# EAGLE board base1 (EAGLE 7.2.0)
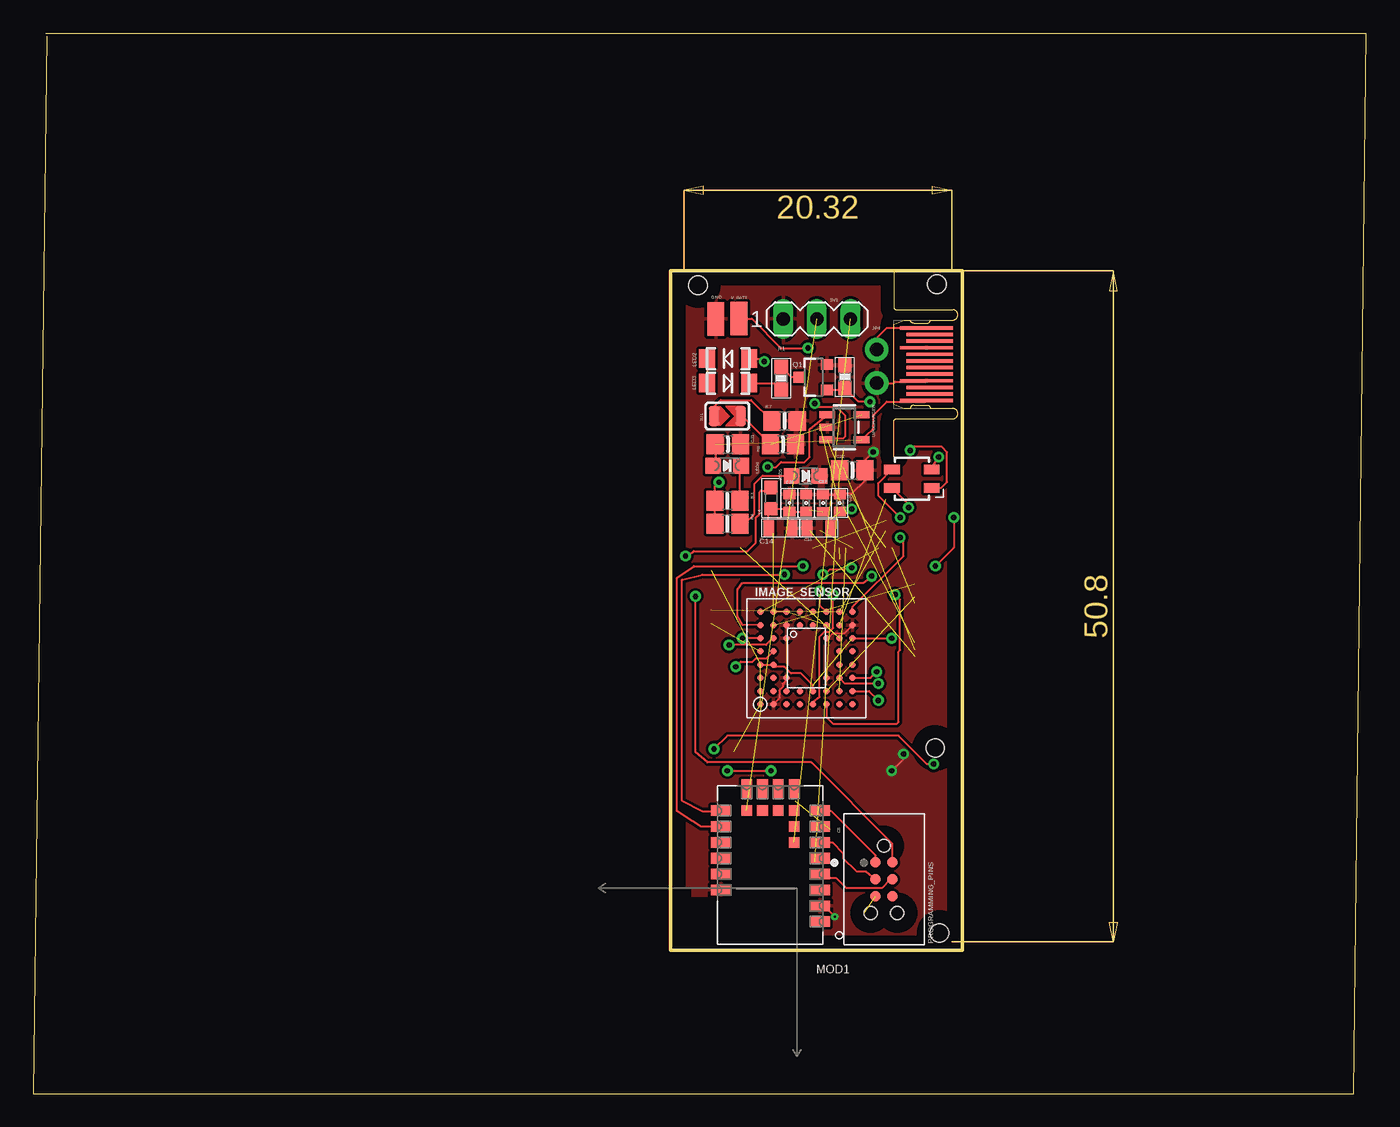
[diagram p0: board, top side]
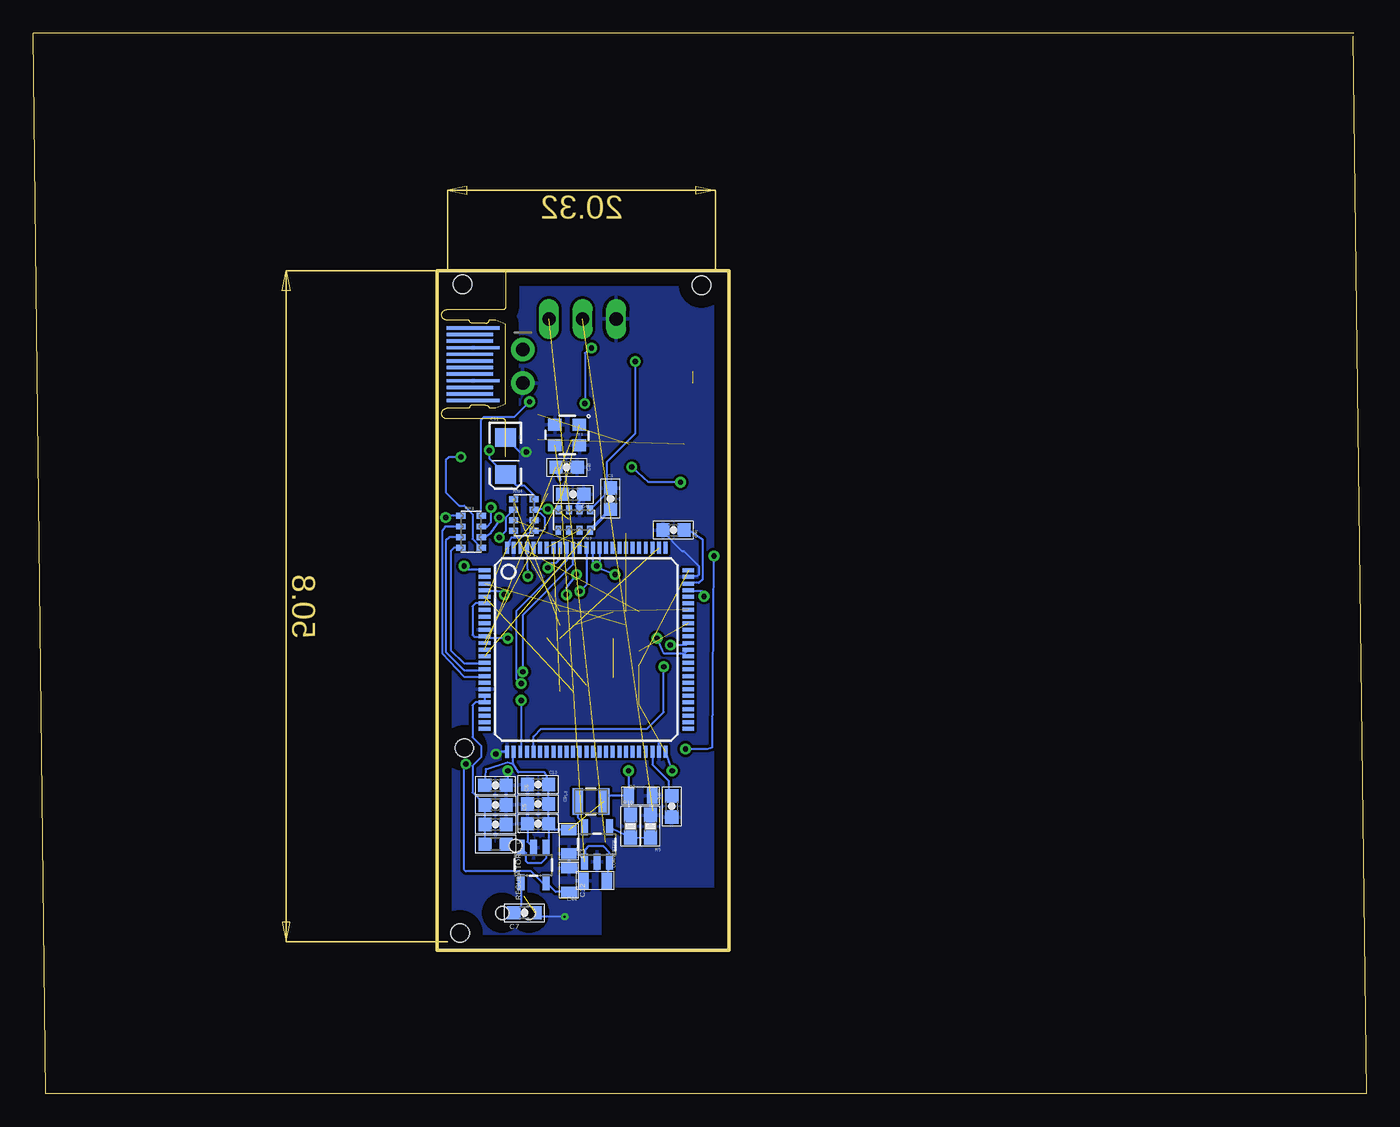
[diagram p1: board, bottom side, seen from below]

Size 100.98 x 80.31 mm. Coordinates in mm from the lower left corner, seen from the top.
Outline: 100.97,80.31 100,0 0,0 1.02,80.07
Outline: 0.98,80.31 100.98,80.31
Outline: 48.26,10.87 70.36,10.87 70.36,62.3 48.26,62.3 48.26,10.87
Copper layers (1*16): Top 0.035mm / dielectric 1.5mm / Bottom 0.035mm
Design rules "default": minimum track width 10mil, minimum drill 24mil, track to track 8mil, track to pad 8mil, pad to pad 8mil, via to via 8mil, smd to smd 8mil, copper to edge 40mil, drill to drill 8mil, minimum pad ring 10mil, minimum via ring 8mil, stop-mask expansion 4mil, vias tented up to drill 0mil, thermal gap 10mil
Net classes: 0 GND: width 0.002 mm, drill 0 mm
Holes 1.4 mm at 68.65,12.18 68.31,26.18 50.35,61.22 68.45,61.28

## Footprints (pad centres in the part's own frame; a part is rotated, then mirrored left to right if it is on the bottom)
0603-CAP = smd 1 x 1: 1 -0.8,0; 2 0.8,0
0805 = smd 0.8 x 1.2: 1 -0.9,0; 2 0.9,0
EIA3216 = smd 1.4 x 1.6: A 1.4,0; C -1.4,0
0402-CAP = smd 0.7 x 0.9: 1 -0.65,0; 2 0.65,0
0805-NO = smd 1.3 x 1.5: 1 -0.95,0; 2 0.95,0
TSOT25 = smd 0.55 x 1.2: 1 -0.95,-1.3; 2 0,-1.3; 3 0.95,-1.3; 4 0.95,1.3; 5 -0.95,1.3
SMD1,27-2,54 = smd 1.27 x 2.54: 1 0,0
IBGA52 = smd 0.5 x 0.5: A1 -3.5,3.5; A2 -2.5,3.5; A3 -1.5,3.5; A4 -0.5,3.5; A5 0.5,3.5; A6 1.5,3.5; A7 2.5,3.5; A8 3.5,3.5; B1 -3.5,2.5; B2 -2.5,2.5; B3 -1.5,2.5; B4 -0.5,2.5; B5 0.5,2.5; B6 1.5,2.5; B7 2.5,2.5; B8 3.5,2.5; C1 -3.5,1.5; C2 -2.5,1.5; C3 -1.5,1.5; C6 1.5,1.5; C7 2.5,1.5; C8 3.5,1.5; D1 -3.5,0.5; D2 -2.5,0.5; D7 2.5,0.5; D8 3.5,0.5; E1 -3.5,-0.5; E2 -2.5,-0.5; E7 2.5,-0.5; E8 3.5,-0.5; F1 -3.5,-1.5; F2 -2.5,-1.5; F3 -1.5,-1.5; F6 1.5,-1.5; F7 2.5,-1.5; F8 3.5,-1.5; G1 -3.5,-2.5; G2 -2.5,-2.5; G3 -1.5,-2.5; G4 -0.5,-2.5; G5 0.5,-2.5; G6 1.5,-2.5; G7 2.5,-2.5; G8 3.5,-2.5; H1 -3.5,-3.5; H2 -2.5,-3.5; H3 -1.5,-3.5; H4 -0.5,-3.5; H5 0.5,-3.5; H6 1.5,-3.5; H7 2.5,-3.5; H8 3.5,-3.5
1X02_ROUND = drill 1 pad 1.778: 1 -1.27,0; 2 1.27,0
0603 = smd 1 x 1: 1 -0.8,0; 2 0.8,0
1007 = smd 2 x 0.8: 1 0,1; 2 0,-1
LED-TRICOLOR-SMD-MF = smd 0.7 x 1.2: A 0.7,1.5; B 0.7,-1.5; G -0.7,-1.5; R -0.7,1.5
LED-1206 = smd 1.2 x 1.4: A -1.6,0; C 1.6,0
CHIPLED_0805_NOOUTLINE = smd 1.2 x 1.2: A 0,-1.05; C 0,1.05
SOT23-5 = smd 0.55 x 1.2: 1 -0.95,-1.3; 2 0,-1.3; 3 0.95,-1.3; 4 0.95,1.3; 5 -0.95,1.3
WE-FP-4+ = smd 0.8 x 1.5: 1 -4.3,-3.75; 2 -3.1,-3.75; 3 -1.9,-3.75; 4 -0.7,-3.75; 5 0.5,-3.75; 6 1.7,-3.75; 7 2.9,-3.75; 8 4.1,-3.75; 13 4.1,3.75; 14 2.9,3.75; 15 1.7,3.75; 16 0.5,3.75; 17 -0.7,3.75; 18 -1.9,3.75 | smd 1.5 x 0.8: 9 5.75,-1.8; 10 5.75,-0.6; 11 5.75,0.6; 12 5.75,1.8 | smd 0.8 x 0.8: B1 1.7,-1.8; B2 2.9,-1.8; B3 4.1,-1.8; B4 4.1,-0.6; B5 4.1,0.6; B6 4.1,1.8
TAG_TC2030-IDC-NL = smd 0.787 x 0.787: 1 -1.27,-0.635; 2 -1.27,0.635; 3 0,-0.635; 4 0,0.635; 5 1.27,-0.635; 6 1.27,0.635 | hole 0.991: -2.54,0; 2.54,1.016; 2.54,-1.016
SOT23-3 = smd 0.8 x 0.9: 1 -0.95,-1; 2 0.95,-1; 3 0,1.1
0603-RES = smd 1.1 x 1: 1 -0.85,0; 2 0.85,0
EXBV8V = smd 0.45 x 0.7: 1 -1.2,-0.775; 2 -0.4,-0.775; 3 0.4,-0.775; 4 1.2,-0.775; 5 1.2,0.775; 6 0.4,0.775; 7 -0.4,0.775; 8 -1.2,0.775
SOLDERJUMPER_ARROW_NOPASTE = smd 0.762 x 1.524: 1 -1.016,0; 2 1.016,0
MA03-1 = drill 1.016 long: 1 -2.54,0; 2 0,0; 3 2.54,0
LQFP100 = smd 0.9 x 0.3: 1 -7.72,6; 2 -7.72,5.5; 3 -7.72,5; 4 -7.72,4.5; 5 -7.72,4; 6 -7.72,3.5; 7 -7.72,3; 8 -7.72,2.5; 9 -7.72,2; 10 -7.72,1.5; 11 -7.72,1; 12 -7.72,0.5; 13 -7.72,0; 14 -7.72,-0.5; 15 -7.72,-1; 16 -7.72,-1.5; 17 -7.72,-2; 18 -7.72,-2.5; 19 -7.72,-3; 20 -7.72,-3.5; 21 -7.72,-4; 22 -7.72,-4.5; 23 -7.72,-5; 24 -7.72,-5.5; 25 -7.72,-6; 51 7.72,-6; 52 7.72,-5.5; 53 7.72,-5; 54 7.72,-4.5; 55 7.72,-4; 56 7.72,-3.5; 57 7.72,-3; 58 7.72,-2.5; 59 7.72,-2; 60 7.72,-1.5; 61 7.72,-1; 62 7.72,-0.5; 63 7.72,0; 64 7.72,0.5; 65 7.72,1; 66 7.72,1.5; 67 7.72,2; 68 7.72,2.5; 69 7.72,3; 70 7.72,3.5; 71 7.72,4; 72 7.72,4.5; 73 7.72,5; 74 7.72,5.5; 75 7.72,6 | smd 0.3 x 0.9: 26 -6,-7.72; 27 -5.5,-7.72; 28 -5,-7.72; 29 -4.5,-7.72; 30 -4,-7.72; 31 -3.5,-7.72; 32 -3,-7.72; 33 -2.5,-7.72; 34 -2,-7.72; 35 -1.5,-7.72; 36 -1,-7.72; 37 -0.5,-7.72; 38 0,-7.72; 39 0.5,-7.72; 40 1,-7.72; 41 1.5,-7.72; 42 2,-7.72; 43 2.5,-7.72; 44 3,-7.72; 45 3.5,-7.72; 46 4,-7.72; 47 4.5,-7.72; 48 5,-7.72; 49 5.5,-7.72; 50 6,-7.72; 76 6,7.72; 77 5.5,7.72; 78 5,7.72; 79 4.5,7.72; 80 4,7.72; 81 3.5,7.72; 82 3,7.72; 83 2.5,7.72; 84 2,7.72; 85 1.5,7.72; 86 1,7.72; 87 0.5,7.72; 88 0,7.72; 89 -0.5,7.72; 90 -1,7.72; 91 -1.5,7.72; 92 -2,7.72; 93 -2.5,7.72; 94 -3,7.72; 95 -3.5,7.72; 96 -4,7.72; 97 -4.5,7.72; 98 -5,7.72; 99 -5.5,7.72; 100 -6,7.72
USB_TYPE_C_DS_2 = smd 0.25 x 4: A1 2.75,-2.45; A4 1.25,-2.45; A9 -1.25,-2.45; A12 -2.75,-2.45 | smd 0.25 x 3.5: A2 2.25,-2.7; A3 1.75,-2.7; A5 0.75,-2.7; A6 0.25,-2.7; A7 -0.25,-2.7; A8 -0.75,-2.7; A10 -1.75,-2.7; A11 -2.25,-2.7 | smd 0.25 x 4 bottom: B1 -2.75,-2.45; B4 -1.25,-2.45; B9 1.25,-2.45; B12 2.75,-2.45 | smd 0.25 x 3.5 bottom: B2 -2.25,-2.7; B3 -1.75,-2.7; B5 -0.75,-2.7; B6 -0.25,-2.7; B7 0.25,-2.7; B8 0.75,-2.7; B10 1.75,-2.7; B11 2.25,-2.7
CRYSTAL-2.5X2.0 = smd 1 x 0.9: 1 -0.95,-0.8; 2 0.9,-0.8; 3 0.9,0.75; 4 -0.95,0.75

## Placement (x,y rotation side)
C1  1uF  [0603-CAP]  57.25,45.06 90 bottom
C2  22uF  [0805]  54.97,22.56 0 bottom
C3  10uF  [0805]  60.4,19.09 90 bottom
C4  1uF  [0603-CAP]  65.95,20.39 0 bottom
C5  0.1uF  [0603-CAP]  65.95,21.87 0 bottom
C6  0.1uF  [0603-CAP]  65.96,23.36 0 bottom
C7  0.1uF  [0603-CAP]  63.76,13.7 0 bottom
C8  0.1uF  [0603-CAP]  62.73,20.46 180 bottom
C9  0.1uF  [0603-CAP]  62.73,21.94 180 bottom
C11  47uF  [EIA3216]  65.2,48.3 270 bottom
C12  10uF  [0805]  60.39,16.19 270 bottom
C13  0.1uF  [0603-CAP]  62.73,23.41 180 bottom
C14  22uF  [0805]  56.6,42.82 180 top
C16  0.1uF  [0402-CAP]  61.09,44.73 90 top
C17  0.1uF  [0402-CAP]  59.83,44.72 90 top
C18  22uF  [0805]  59.51,42.83 0 top
C19  0.1uF  [0402-CAP]  58.55,44.73 90 top
C20  0.1uF  [0402-CAP]  57.28,44.73 90 top
C21  10µF  [0805-NO]  52.61,49.17 0 top
C22  10µF  [0805-NO]  62.04,47.2 0 top
C40  12pF  [0603-CAP]  60.57,47.43 180 bottom
C41  12pF  [0603-CAP]  60.08,45.38 180 bottom
C44  22uF  [0805]  58.42,16.14 0 bottom
C48  2.2uF  [0603-CAP]  52.48,42.68 180 bottom
C49  2.2uF  [0603-CAP]  52.61,21.76 270 bottom
CONVERTER  PAM2305AABADJ  [TSOT25]  58.27,18.88 0 bottom
GND  [SMD1,27-2,54]  51.71,58.67 180 top
IMAGE_SENSOR  MT9V022  [IBGA52]  58.57,32.99 90 top
JP4  [1X02_ROUND]  63.89,55.08 270 bottom
L1  MPZ1608S181ATAH0  [0603]  65.95,18.91 0 bottom
L3  4.7uH/1.4A  [1007]  58.74,22.14 90 bottom
L4  MPZ1608S181ATAH0  [0603]  55.89,45.1 270 top
LED1  LED-TRICOLOR  [LED-TRICOLOR-SMD-MF]  66.55,46.57 270 top
LED2  VSMY12850  [LED-1206]  52.64,55.65 180 top
LED3  VSMY12850  [LED-1206]  52.63,53.8 0 top
LED4  RED  [CHIPLED_0805_NOOUTLINE]  52.56,47.55 270 top
LED5  GREEN  [CHIPLED_0805_NOOUTLINE]  58.5,46.78 270 top
LIPOCHARGER  MCP73831T-2ACI/OT  [SOT23-5]  61.44,50.46 270 top
MOD1  WIRL-BTLE_2611011024000  [WE-FP-4+]  55.84,17.34 90 top
PROGRAMMING_PINS  TC2030-IDC-NL  [TAG_TC2030-IDC-NL]  64.44,16.25 270 top
Q1  BSS138  [SOT23-3]  59.13,54.25 90 top
R1  10R  [0603-RES]  56.65,54.17 270 top
R2  10K  [0603-RES]  61.48,54.28 270 top
R3  470  [0805-NO]  52.58,44.91 180 top
R4  470  [0805-NO]  52.58,43.16 180 top
R5  100K  [0603-RES]  54.22,20.26 270 bottom
R6  10K\  [0805-NO]  56.79,49.18 0 top
R7  2.5K  [0805-NO]  56.91,50.94 0 top
R10  451K6  [0603-RES]  55.73,20.26 270 bottom
REGULATOR  TPS731XX  [SOT23-5]  63.08,17.32 180 bottom
RN1  220R  [EXBV8V]  67.8,42.55 90 bottom
RN3  10K  [EXBV8V]  60,43.44 0 bottom
RN4  10K  [EXBV8V]  63.82,43.81 90 bottom
SJ1  [SOLDERJUMPER_ARROW_NOPASTE]  52.58,51.31 0 top
SV1  [MA03-1]  59.36,58.67 0 top
U1  STM32H743VIT6  [LQFP100]  59.08,33.63 0 bottom
USBC-CONNECTOR  PCB_USB_C_2.0DS_2  [USB_TYPE_C_DS_2]  65.19,55.23 90 top
V_BATT  [SMD1,27-2,54]  53.46,58.68 180 top
Y1  7S-12.000MAHE-T  [CRYSTAL-2.5X2.0]  60.56,49.85 180 bottom

## Library data of the parts
C1-C9 C11-C14 C16-C20 C40 C41 C44 C48 C49 L1 L3 L4 LED1-LED3 Q1 R1 R2 R5 R10 = sfe
C21 C22 JP4 LED4 LED5 LIPOCHARGER R3 R4 R6 R7 = microbuilder
CONVERTER = regulators
GND V_BATT = wirepad
IMAGE_SENSOR = MT9V022
MOD1 = WE_WIRL_Rev13.0; HEIGHT: 2mm; MANUFACTURER: Würth Elektronik; NR: 2611011024000
PROGRAMMING_PINS = TC2030-IDC-NL; AVAILABILITY: Not in stock; CHECK_PRICES: https://www.snapeda.com/parts/TC2030-IDC-NL/Tag-Connect/view-part/?ref=eda; DESCRIPTION: PLUG-OF-NAILS 6-PIN W/O LEGS 8; MF: Tag-Connect; MP: TC2030-IDC-NL; PACKAGE: None; PRICE: None; SNAPEDA_LINK: https://www.snapeda.com/parts/TC2030-IDC-NL/Tag-Connect/view-part/?ref=snap
REGULATOR Y1 = mux
RN1 RN3 RN4 = resistor-dil; OC_FARNELL: unknown; OC_NEWARK: unknown
SJ1 = microbuilder; BOM: EXCLUDE
SV1 = con-lstb; OC_FARNELL: unknown; OC_NEWARK: unknown
U1 = stm32
USBC-CONNECTOR = USB_pcb_connectors

## Nets
BOOT0: RN3.3 U1.94
DAC: U1.29
DCMI_CLK: IMAGE_SENSOR.A5 U1.67
DCMI_D0: IMAGE_SENSOR.A6 U1.63
DCMI_D1: IMAGE_SENSOR.B6 U1.64
DCMI_D2: IMAGE_SENSOR.A7 U1.97
DCMI_D3: IMAGE_SENSOR.A8 U1.98
DCMI_D4: IMAGE_SENSOR.B7 U1.3
DCMI_D5: IMAGE_SENSOR.E1 U1.92
DCMI_D6: IMAGE_SENSOR.F1 U1.4
DCMI_D7: IMAGE_SENSOR.F2 U1.5
DCMI_D8: IMAGE_SENSOR.G1
DCMI_D9: IMAGE_SENSOR.H1
DCMI_HSYNC: IMAGE_SENSOR.H2 U1.28
DCMI_PCLK: IMAGE_SENSOR.B5 U1.30
DCMI_PWDN: IMAGE_SENSOR.F8 RN4.7 U1.88
DCMI_RST: IMAGE_SENSOR.G8 RN4.8 U1.69
DCMI_SCL: IMAGE_SENSOR.H4
DCMI_SDA: IMAGE_SENSOR.G4
DCMI_VSYNC: IMAGE_SENSOR.G2 U1.93
EXPST: U1.55
FREX: U1.56
FS_DM: U1.70
FS_DP: U1.71
GND: C1.2 C2.2 C3.1 C4.2 C5.2 C6.2 C7.2 C8.2 C9.2 C11.C C12.1 C13.2 C14.1 C16.2 C17.2 C18.1 C19.2 C20.2 C21.2 C22.2 C40.1 C41.1 C44.1 C48.2 C49.2 CONVERTER.2 GND.1 IMAGE_SENSOR.B1 IMAGE_SENSOR.C3 IMAGE_SENSOR.C6 IMAGE_SENSOR.C7 IMAGE_SENSOR.F3 IMAGE_SENSOR.F6 IMAGE_SENSOR.H7 JP4.2 LED5.C LIPOCHARGER.2 MOD1.2 MOD1.18 PROGRAMMING_PINS.5 Q1.2 R2.1 R5.1 R6.2 R7.2 REGULATOR.2 RN3.6 RN4.2 SV1.1 U1.10 U1.19 U1.26 U1.49 U1.74 U1.99 USBC-CONNECTOR.A4 USBC-CONNECTOR.A9 USBC-CONNECTOR.B4 USBC-CONNECTOR.B9 Y1.2 Y1.4
GPIO1: U1.84
GPIO2: U1.85
GPIO3: U1.82
GPIOB1: MOD1.B1 SV1.3
GPIOB2: MOD1.B6 SV1.2
I2C1_SCL: U1.95
I2C1_SDA: U1.96
I2C2_SCL: U1.46
I2C2_SDA: U1.47
LED_B: RN1.6 U1.17
LED_G: RN1.7 U1.16
LED_IR: RN1.5 U1.1
LED_R: RN1.8 U1.15
N$1: LED4.C R3.1
N$2: C40.2 U1.13 Y1.3
N$3: LIPOCHARGER.1 R3.2 R4.2
N$4: C41.2 U1.12 Y1.1
N$5: Q1.1 R2.2 RN1.4
N$6: LED1.B RN1.3
N$8: LED1.R RN1.1
N$9: LED1.G RN1.2
N$10: LED3.C R1.2
N$11: C7.1 REGULATOR.4
N$12: C4.1 C5.1 L1.1 U1.20 U1.21
N$13: CONVERTER.4 R5.2 R10.2
N$14: Q1.3 R1.1
N$15: LIPOCHARGER.5 R6.1 SJ1.2
N$16: LED5.A R4.1
N$17: LED2.C LED3.A
N$18: R7.1 SJ1.1
N$19: IMAGE_SENSOR.G7 RN4.5
N$20: IMAGE_SENSOR.H8 RN4.6
N$30: U1.62
N$31: U1.22
N$32: U1.23
N$33: U1.24
N$34: U1.25
NRST: C1.1 RN3.4 U1.14
RAW: C22.1 C44.2 CONVERTER.1 CONVERTER.3 LIPOCHARGER.3 V_BATT.1
RESETB: MOD1.6 PROGRAMMING_PINS.3
SD_CD: U1.81
SDIO_CLK: U1.80
SDIO_CMD: U1.83
SDIO_D0: U1.65
SDIO_D2: U1.78
SDIO_D3: U1.79
SPI2_MISO: U1.53
SPI2_MOSI: U1.54
SPI2_NSS: U1.51
SPI2_SCLK: U1.52
SPI3_MISO: IMAGE_SENSOR.H3 U1.90
SPI3_MOSI: IMAGE_SENSOR.G3 U1.91
SPI3_SCLK: IMAGE_SENSOR.G5
SPI3_SCLK/TRACESWO: U1.89
SPI3_SSEL: IMAGE_SENSOR.G6 U1.77
SW: CONVERTER.5 L3.1
SWCLK: U1.76
SWDCLKB: MOD1.4 PROGRAMMING_PINS.4
SWDIO: PROGRAMMING_PINS.2 U1.72
SWDIOB: MOD1.5
TIM4_CH1: U1.59
TIM4_CH2: U1.60
TIM4_CH3: U1.61
UART2_RX: MOD1.14 U1.87
UART2_TX: MOD1.13 U1.86
VAA: C14.2 C19.1 C20.1 IMAGE_SENSOR.B8 IMAGE_SENSOR.C8 IMAGE_SENSOR.F7 L4.2
VBAT: C2.1 C3.2 C6.1 C8.1 C9.1 C11.A C13.1 C16.1 C17.1 C18.2 IMAGE_SENSOR.A1 IMAGE_SENSOR.A4 IMAGE_SENSOR.B4 IMAGE_SENSOR.E2 IMAGE_SENSOR.H6 L1.2 L3.2 LED1.A LED2.A R10.1 REGULATOR.1 REGULATOR.3 RN3.5 RN4.1 RN4.3 RN4.4 U1.6 U1.11 U1.27 U1.50 U1.75 U1.100
VBUS: U1.68
VCAP1: C49.1 U1.48
VCAP2: C48.1 U1.73
VCC: MOD1.8 PROGRAMMING_PINS.1
VDD: C21.1 JP4.1 LED4.A LIPOCHARGER.4 USBC-CONNECTOR.A1 USBC-CONNECTOR.A12 USBC-CONNECTOR.B1 USBC-CONNECTOR.B12
VDDA: C12.2 L4.1 REGULATOR.5

## Tracks (layer width: path | path; a pad name or v marks a point on that pad's centre or on a via)
BOOT0  (1 unrouted)
DCMI_CLK  (1 unrouted)
DCMI_D0  (via drill 0.41)
  Top 0.152: IMAGE_SENSOR.A6 v53.73,34.49
  Bottom 0.152: v53.73,34.49 53.34,33.6 53.22,33.35 51.64,33.35 U1.63
DCMI_D1  (via drill 0.41)
  Top 0.152: IMAGE_SENSOR.B6 56.01,34.49 55.5,33.98 v52.71,33.98
  Bottom 0.152: v52.71,33.98 51.5,33.98 U1.64
DCMI_D2  (via drill 0.41)
  Top 0.152: IMAGE_SENSOR.A7 53.73,35.51 53.34,36.14 53.34,38.17 53.73,38.68 62.87,38.68 63.38,39.06 v63.5,39.19
  Bottom 0.152: v63.5,39.19 U1.97
DCMI_D3  (1 unrouted)
DCMI_D4  (1 unrouted)
DCMI_D5  (via drill 0.41)  (1 unrouted)
  Top 0.152: IMAGE_SENSOR.E1 59.07,29.68 59.57,30.05 59.57,34.62 59.95,35 60.33,35 60.58,35.25 v60.58,37.79 | v59.82,39.32 59.82,39.19 60.33,39.7 61.09,39.7 v61.98,39.83
  Bottom 0.152: v60.58,37.79 60.58,38.3 v59.82,39.32 | 61.09,41.34 U1.92 | v61.98,39.83 61.98,39.95 61.73,40.21 61.35,40.21 61.09,40.46
DCMI_D6  (via drill 0.41)
  Top 0.152: IMAGE_SENSOR.F1 60.07,28.53 60.58,28.01 65.41,28.01 65.54,28.14 65.54,33.48 65.66,33.6 65.66,37.41 v65.28,37.79
  Bottom 0.152: v65.28,37.79 65.28,37.92 65.79,38.05 66.71,38.05 U1.4
DCMI_D7  (1 unrouted)
DCMI_HSYNC  (via drill 0.41)
  Top 0.152: IMAGE_SENSOR.H2 63.31,30.49 v64.01,29.79
  Bottom 0.152: v64.01,29.79 64.01,25.98 U1.28
DCMI_PCLK  (via drill 0.41)
  Top 0.152: v53.22,32.33 53.6,32.71 54.49,32.71 54.74,32.97 55.54,32.97 IMAGE_SENSOR.B5
  Bottom 0.152: U1.30 63.08,27.05 62.49,27.63 54.49,27.63 53.22,28.9 v53.22,32.33
DCMI_PWDN  (via drill 0.41)  (1 unrouted)
  Top 0.152: IMAGE_SENSOR.F8 59.57,36.99 v59.57,38.05
  Bottom 0.152: U1.88 59.08,38.54 v59.57,38.05
DCMI_RST  (2 unrouted)
DCMI_VSYNC  (1 unrouted)
GND  (via drill 0.15, 0.41)  (4 unrouted)
  Top 0.152: IMAGE_SENSOR.C3 57.07,31.36 56.77,31.06 56.77,30.81 56.52,30.55 56.52,29.94 IMAGE_SENSOR.B1 | JP4.2 65.17,53.81 65.28,53.92 67.58,53.92 USBC-CONNECTOR.B4 | IMAGE_SENSOR.F6 60.2,34.49 60.58,34.87 61.45,34.87 IMAGE_SENSOR.H7 | MOD1.2 59.88,14.24 v60.71,13.41 | C16.2 61.12,45.41 61.98,45.41 62.99,46.42 C22.2 62.99,47.95 v63.63,48.59 | C17.2 C16.2 | v65.92,25.73 65.92,25.35 v65.03,24.46
  Top 0.254: C16.2 | 59.83,46.5 LED5.C
  Bottom 0.152: U1.49 53.58,26.51 53.47,26.62 | C13.2 63.53,23.85 | C8.2 63.53,19.08 REGULATOR.2 | v60.71,13.41 62.67,13.41 C7.2 | v63.63,48.59 64.09,48.59 C11.C | RN3.6 59.85,44.43 C41.1 | U1.26 65.73,25.91 v65.92,25.73 | v65.03,24.46 65.03,23.48 C6.2 | C48.2 53.28,42.56 51.82,41.1 51.69,41.1 50.55,39.95 50.55,39.32 50.68,39.19 51.3,39.19 U1.74
  Bottom 0.254: 60.4,17.1 C12.1 | 62.95,18.49 REGULATOR.2
  pour Bottom: 48.39,62.3 70.24,62.3 70.24,61.92 70.36,62.05 70.36,11 48.52,10.87 48.52,11 48.39,11
  pour Top: 48.26,62.43 70.36,62.3 70.36,10.87 48.26,10.74
GPIOB1  (1 unrouted)
GPIOB2  (1 unrouted)
LED_B
  Bottom 0.152: RN1.6 69.78,42.95 69.98,42.62 69.98,33.35 68.33,31.57 66.86,31.57 U1.17
LED_G
  Bottom 0.152: RN1.7 69.43,42.15 69.73,41.86 69.73,33.48 68.33,32.08 66.85,32.08 U1.16
LED_IR  (via drill 0.41)
  Top 0.152: v69.73,43.64 69.73,41.35 v68.33,39.95
  Bottom 0.152: RN1.5 69.61,43.75 v69.73,43.64 | v68.33,39.95 68.08,39.7 66.86,39.7 U1.1
LED_R
  Bottom 0.152: RN1.8 69.09,41.35 69.35,41.1 69.35,33.6 68.33,32.59 66.84,32.59 U1.15
N$1
  Top 0.152: R3.1 53.53,47.48 LED4.C
N$2  (2 unrouted)
  Bottom 0.254: C40.2 61.08,46.51
N$3  (via drill 0.41)
  Top 0.152: R4.2 R3.2 | R3.2 | R3.2 51.63,45.99 v51.95,46.3 | v55.63,47.45 56.27,47.45 56.65,47.83 58.42,47.83 58.81,48.21 58.81,50.33 LIPOCHARGER.1
  Bottom 0.152: v51.95,46.3 54.36,46.3 v55.63,47.45
N$4  (2 unrouted)
N$5  (via drill 0.41)
  Top 0.152: Q1.1 61.35,53.3 R2.2 62.51,52.4 v63.38,52.4
  Bottom 0.152: RN1.4 67.03,51.03 66.81,51.26 64.52,51.26 v63.38,52.4
N$6  (via drill 0.41)
  Top 0.152: v66.3,44.4 66.3,44.62 LED1.B
  Bottom 0.152: RN1.3 66.6,42.95 66.3,43.25 v66.3,44.4
N$8  (via drill 0.41)
  Top 0.152: LED1.R 68.05,47.42 v68.58,48.21
  Bottom 0.152: v68.58,48.21 69.47,48.21 69.73,47.95 69.73,45.54 68.71,44.52 68.33,44.52 67.7,43.89 67.7,42.02 RN1.1
N$9  (via drill 0.41)
  Top 0.152: v65.66,43.64 64.01,45.29 64.01,46.23 LED1.G
  Bottom 0.152: RN1.2 66.77,42.15 66.3,42.49 65.66,43.38 v65.66,43.64
N$10
  Top 0.152: LED3.C 56.17,53.8 R1.2
N$11
  Bottom 0.152: REGULATOR.4 64.03,14.24 C7.1
N$12
  Bottom 0.152: L1.1 C4.1 C5.1 67.7,22.82 67.7,24.84 67.06,25.47 67.06,26.36 67.7,27 67.7,29.41 67.47,29.63 U1.21 U1.20
N$13
  Bottom 0.152: CONVERTER.4 R10.2 R5.2
N$14
  Top 0.152: Q1.3 57.42,54.25 R1.1
N$15  (1 unrouted)
  Top 0.152: SJ1.2 53.71,51.31 R6.1
N$16
  Top 0.152: R4.1 53.89,43.16 54.61,43.89 54.61,46.18 55.25,46.81 57.42,46.81 LED5.A
N$17  (1 unrouted)
  Top 0.152: LED2.C 51.04,54.7
N$18
  Top 0.152: SJ1.1 51.57,52.02 52.07,52.53 54.38,52.53 R7.1
N$19  (1 unrouted)
N$20  (via drill 0.41)
  Top 0.152: IMAGE_SENSOR.H8 62.07,36.87 65.92,40.71 65.92,41.86 v65.66,42.11
  Bottom 0.152: v65.66,42.11 65.16,42.62 65.16,43.65 RN4.6
NRST  (1 unrouted)
  Bottom 0.254: C1.1 58.35,43.12 RN3.4
RAW  (via drill 0.41)  (2 unrouted)
  Top 0.152: V_BATT.1 54.43,58.68 56.65,56.46 v58.68,56.46 | v59.19,52.27 59.44,52.02 60.84,52.02 61.47,51.38 61.47,49.73 61.35,49.6 60.36,49.6 LIPOCHARGER.3
  Bottom 0.152: C44.2 CONVERTER.3 57.32,18.27 57.79,18.74 58.93,18.74 59.19,18.49 59.19,17.61 CONVERTER.1 | v58.68,56.46 58.81,56.46 59.19,56.08 v59.19,52.27
RESETB
  Top 0.152: MOD1.6 60.54,19.04 61.35,18.24 61.35,17.85 62.36,16.84 63.08,16.84 PROGRAMMING_PINS.3
SPI3_MISO  (via drill 0.41)
  Top 0.152: IMAGE_SENSOR.H3 63.43,31.49 v63.89,31.95
  Bottom 0.152: v63.89,31.95 63.89,36.27 60.08,40.08 U1.90 | U1.90
SPI3_MOSI  (via drill 0.41)
  Top 0.152: v64.01,31.06 61.5,31.06 IMAGE_SENSOR.G3
  Bottom 0.152: U1.91 60.58,40.34 64.39,36.52 64.39,31.44 v64.01,31.06
SPI3_SSEL  (1 unrouted)
SW
  Bottom 0.152: CONVERTER.5 59.22,20.43 59.69,20.9 59.69,22.09 L3.1
SWDCLKB
  Top 0.152: PROGRAMMING_PINS.4 64.95,16.25 64.27,15.57 61.6,15.57 60.84,16.33 59.89,16.33 MOD1.4
SWDIO  (via drill 0.41)
  Top 0.152: PROGRAMMING_PINS.2 65.07,18.95 58.93,25.09 51.06,25.09 50.17,25.86 v50.17,37.67
  Bottom 0.152: v50.17,37.67 50.17,37.92 50.3,38.05 51.27,38.05 U1.72
UART2_RX  (via drill 0.41)
  Top 0.152: MOD1.14 50.58,20.24 48.77,21.41 48.77,39.06 50.04,39.95 v58.3,39.95
  Bottom 0.152: v58.3,39.95 58.55,40.33 58.55,41.33 U1.87
UART2_TX  (via drill 0.41)
  Top 0.152: v56.9,39.32 50.68,39.32 49.15,38.94 49.15,22.17 50.68,21.41 52.06,21.41 MOD1.13
  Bottom 0.152: v56.9,39.32 57.92,39.7 58.04,40.21 58.04,41.32 U1.86
VAA  (2 unrouted)
  Top 0.152: IMAGE_SENSOR.C8 IMAGE_SENSOR.B8 | 56.07,42.46 C14.2 55.7,44.12 | L4.2 57.06,44.3 | C20.1 C19.1
  Top 0.254: 55.7,44.12 L4.2 | 57.06,44.3 C20.1
VBAT  (via drill 0.41)  (8 unrouted)
  Top 0.152: IMAGE_SENSOR.E2 59.07,30.93 58.17,31.82 57.41,31.82 56.9,32.33 56.23,32.33 IMAGE_SENSOR.B4 IMAGE_SENSOR.A4 | IMAGE_SENSOR.H6 65.28,34.49 v65.03,34.49 | LED2.A 55.17,55.65 v55.38,55.45 | LED1.A 68.79,45.87 69.22,46.3 69.22,48.59 68.84,48.97 66.68,48.97 v66.43,48.72 | C18.2 60.41,43.49 C17.1 | C16.1 61.79,44.08 v61.98,44.27 | v52.58,24.46 v55.88,24.46
  Bottom 0.152: 65.15,18.62 L1.2 64.86,18.62 REGULATOR.3 63.63,18.22 63.63,17.6 63.5,17.47 62.49,17.47 62.13,17.83 REGULATOR.1 61.93,18.82 C8.1 | RN4.3 RN4.4 62.91,45.2 63.76,46.05 64.35,46.05 C11.A 66.43,48.13 v66.43,48.72 | C8.1 C9.1 C13.1 62.06,24.03 62.23,24.33 64.21,24.33 64.62,25 | C6.1 66.68,24.59 65.03,25.09 64.62,25 | 64.62,25 U1.27 | v65.03,34.49 66.65,34.49 U1.11 66.81,34.62 67.57,34.62 67.7,34.75 67.7,36.9 67.47,37.13 U1.6 66.77,37.16 | C3.2 61.47,19.99 C8.1 | v55.38,55.45 55.38,49.99 57.54,47.83 57.54,45.48 RN3.5 | RN4.3 62.56,43.96 62.23,43.64 62.23,42.75 62.36,42.62 62.65,42.62 RN4.1 63.64,42.36 64.01,42.11 64.77,42.11 64.9,41.86 64.9,41.53 U1.100 | v61.98,44.27 62.86,44.27 RN4.3 | C2.1 55.87,21.25 R10.1 | C2.1 57.31,22.56 L3.2 | U1.50 52.82,25.11 v52.58,24.46 | v55.88,24.46 55.88,22.58 C2.1
  Bottom 0.254: 64.9,18.66 L1.2
VCAP1
  Bottom 0.152: U1.48 54.08,24.94 52.84,23.7 52.84,22.78 C49.1
  Bottom 0.254: U1.48
VCAP2
  Bottom 0.152: C48.1 51.25,42.68 50.3,41.98 50.3,38.94 50.55,38.68 51.31,38.68 U1.73
VCC
  Top 0.152: PROGRAMMING_PINS.1 63.8,18.06 60.46,21.41 59.61,21.41 MOD1.8
VDD  (1 unrouted)
  Top 0.152: JP4.1 63.89,57.23 64.65,57.99 USBC-CONNECTOR.B12 | C21.1 51.66,47.71 LED4.A | LIPOCHARGER.4 63.03,49.77 63.63,50.37 63.63,51.38 64.65,52.4 67.56,52.4 USBC-CONNECTOR.B1
VDDA  (via drill 0.41)
  Top 0.152: v68.2,24.97 67.7,24.97 65.54,27.13 52.58,27.13 v51.57,26.11 | v49.41,40.71 50.04,41.1 54.11,41.1 54.74,41.73 54.74,43.64 55,43.89 55,45.54 55.12,45.67 55.66,45.67 L4.1
  Bottom 0.152: C12.2 61.4,15.29 REGULATOR.5 62.43,16.02 63.25,16.84 68.2,16.84 68.33,16.97 68.33,24.84 v68.2,24.97 | v51.57,26.11 49.92,26.11 49.53,26.24 v49.41,40.71